# Altium PCB IMX291.PcbDoc
Units mil, origin at the board's own origin, x right, y up, seen from the top; angles counter-clockwise.
Board outline 2450 x 2235 mil, 4 copper layers (Top Layer, Signal Layer 1, Signal Layer 2, Bottom Layer), stack 30.634 mil thick; 97 components, 77 nets, 451 pads, 95 vias.
Unrouted connection lines stored in the file: 1.
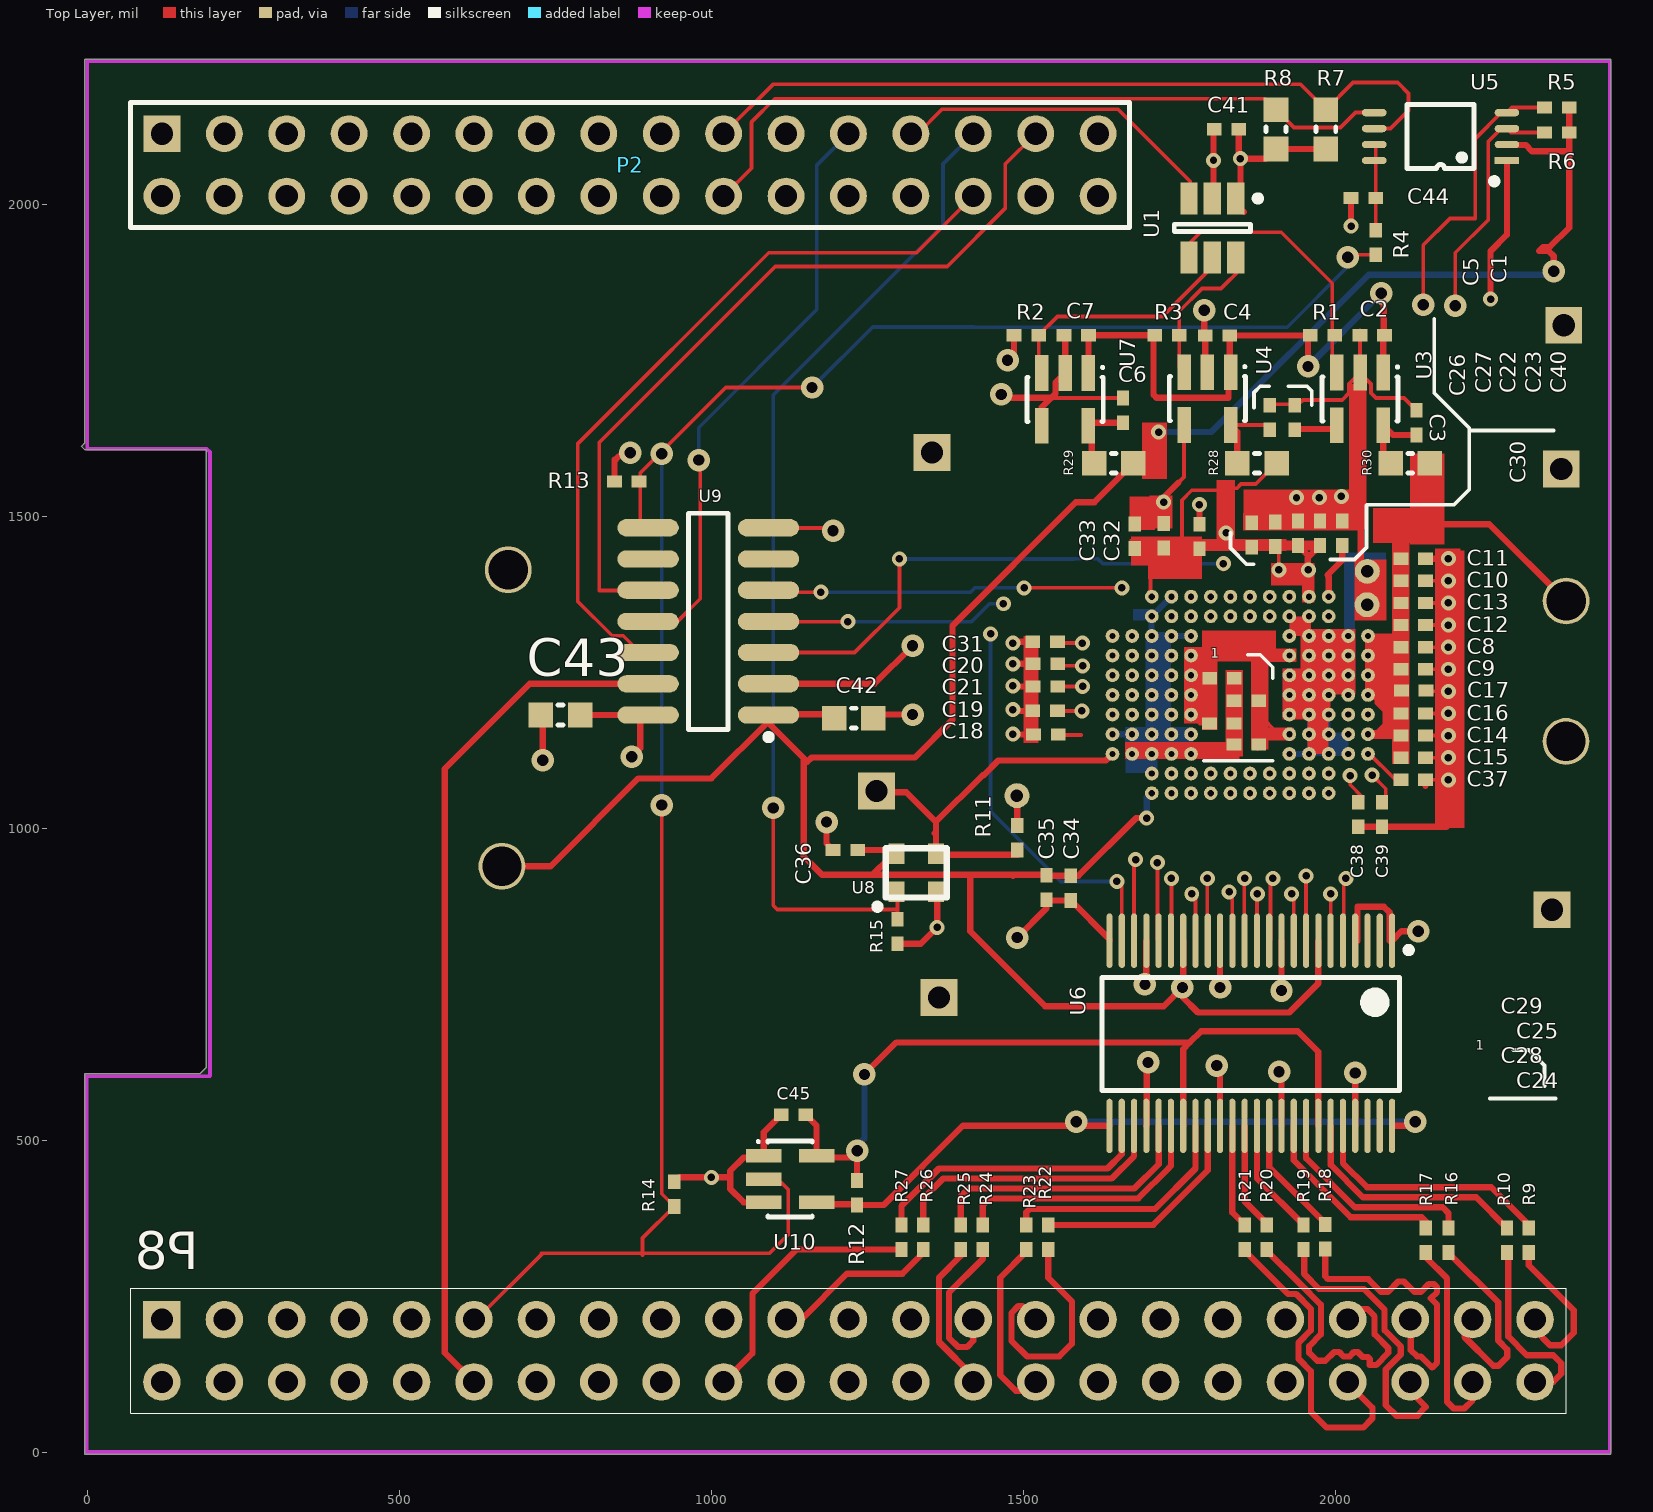
[diagram p0: Top Layer view]
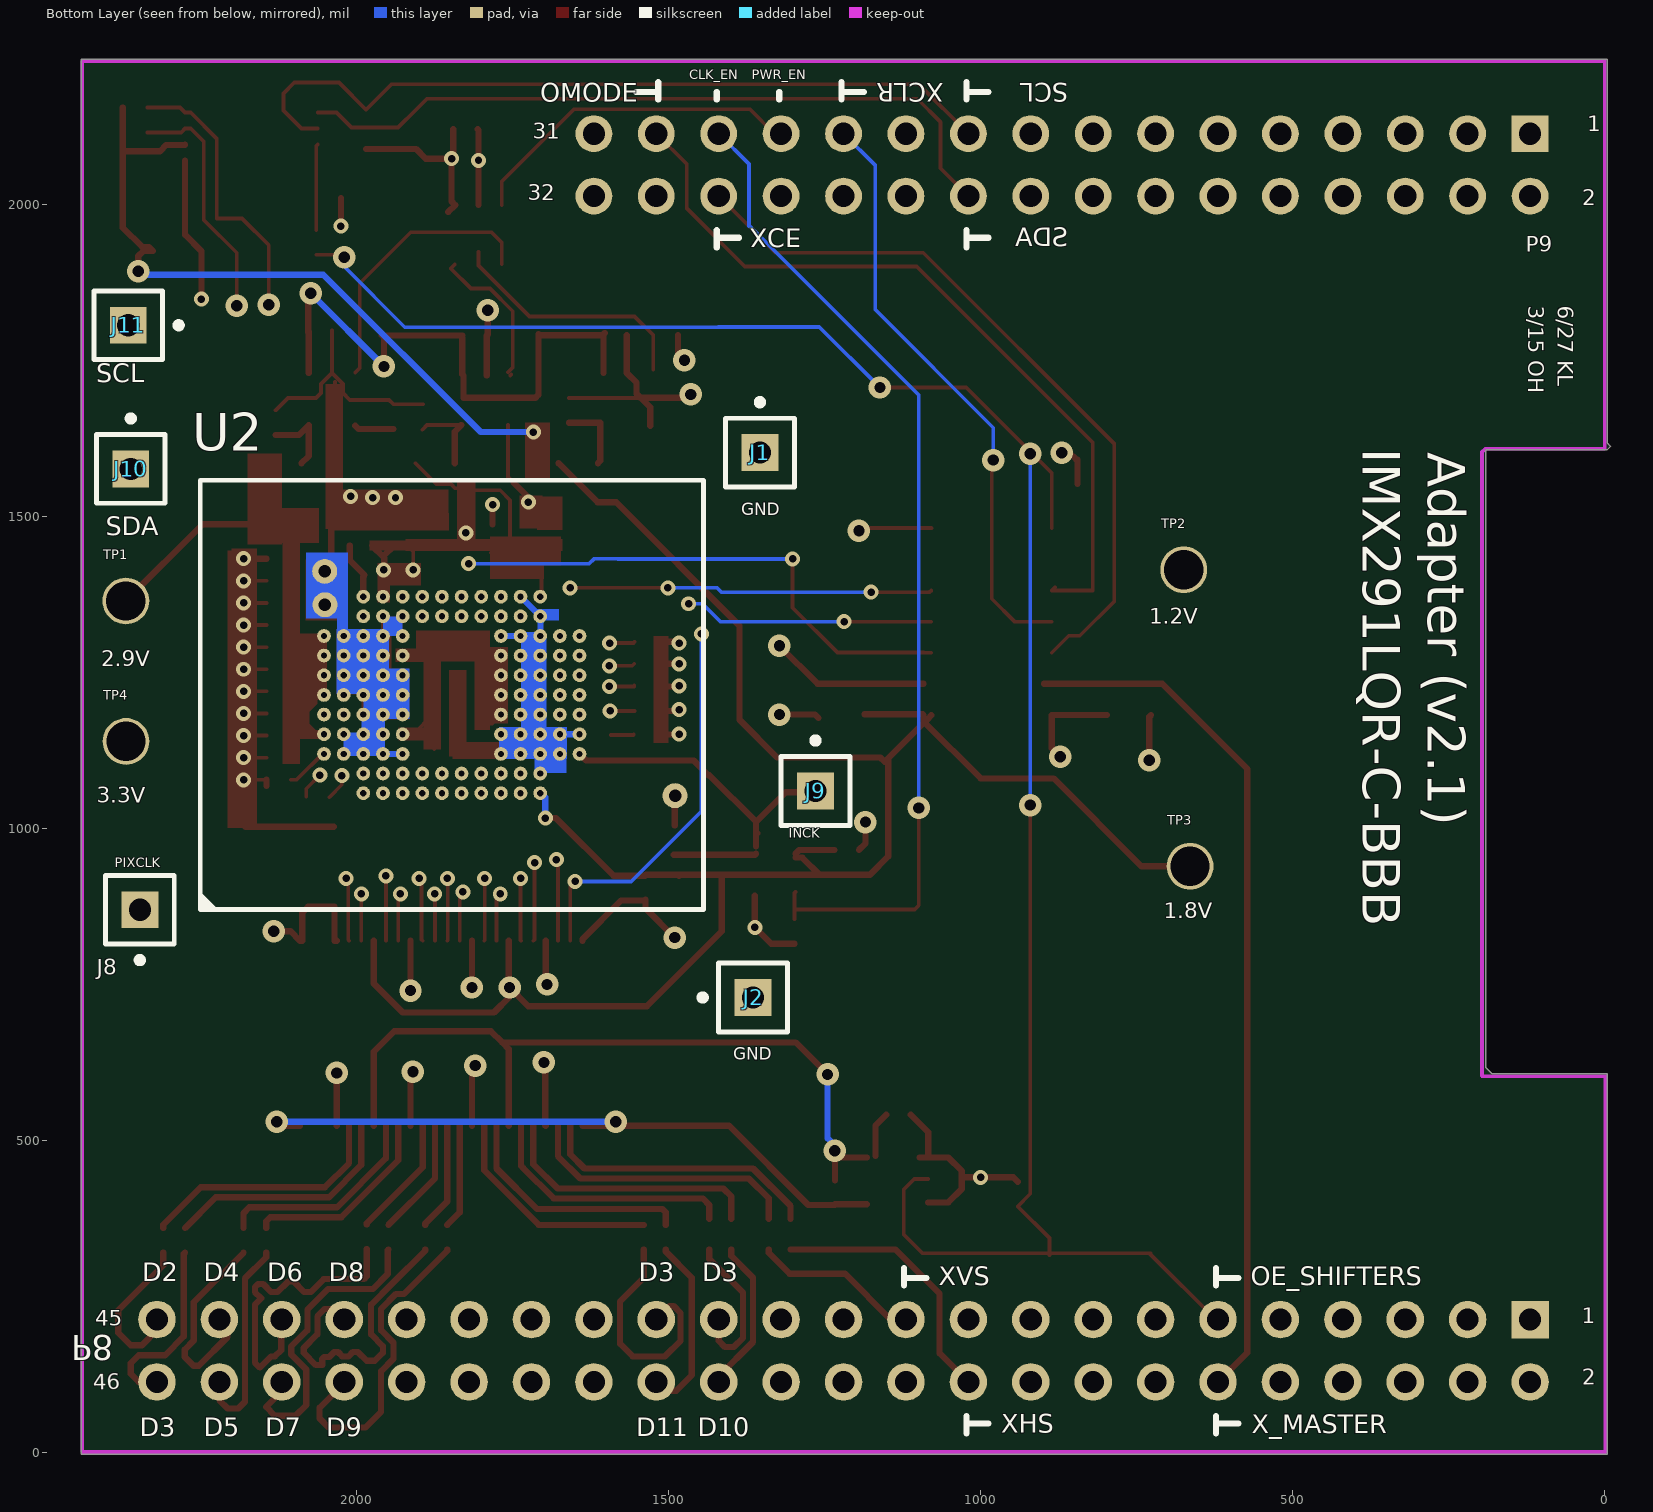
[diagram p1: Bottom Layer view, seen from below]
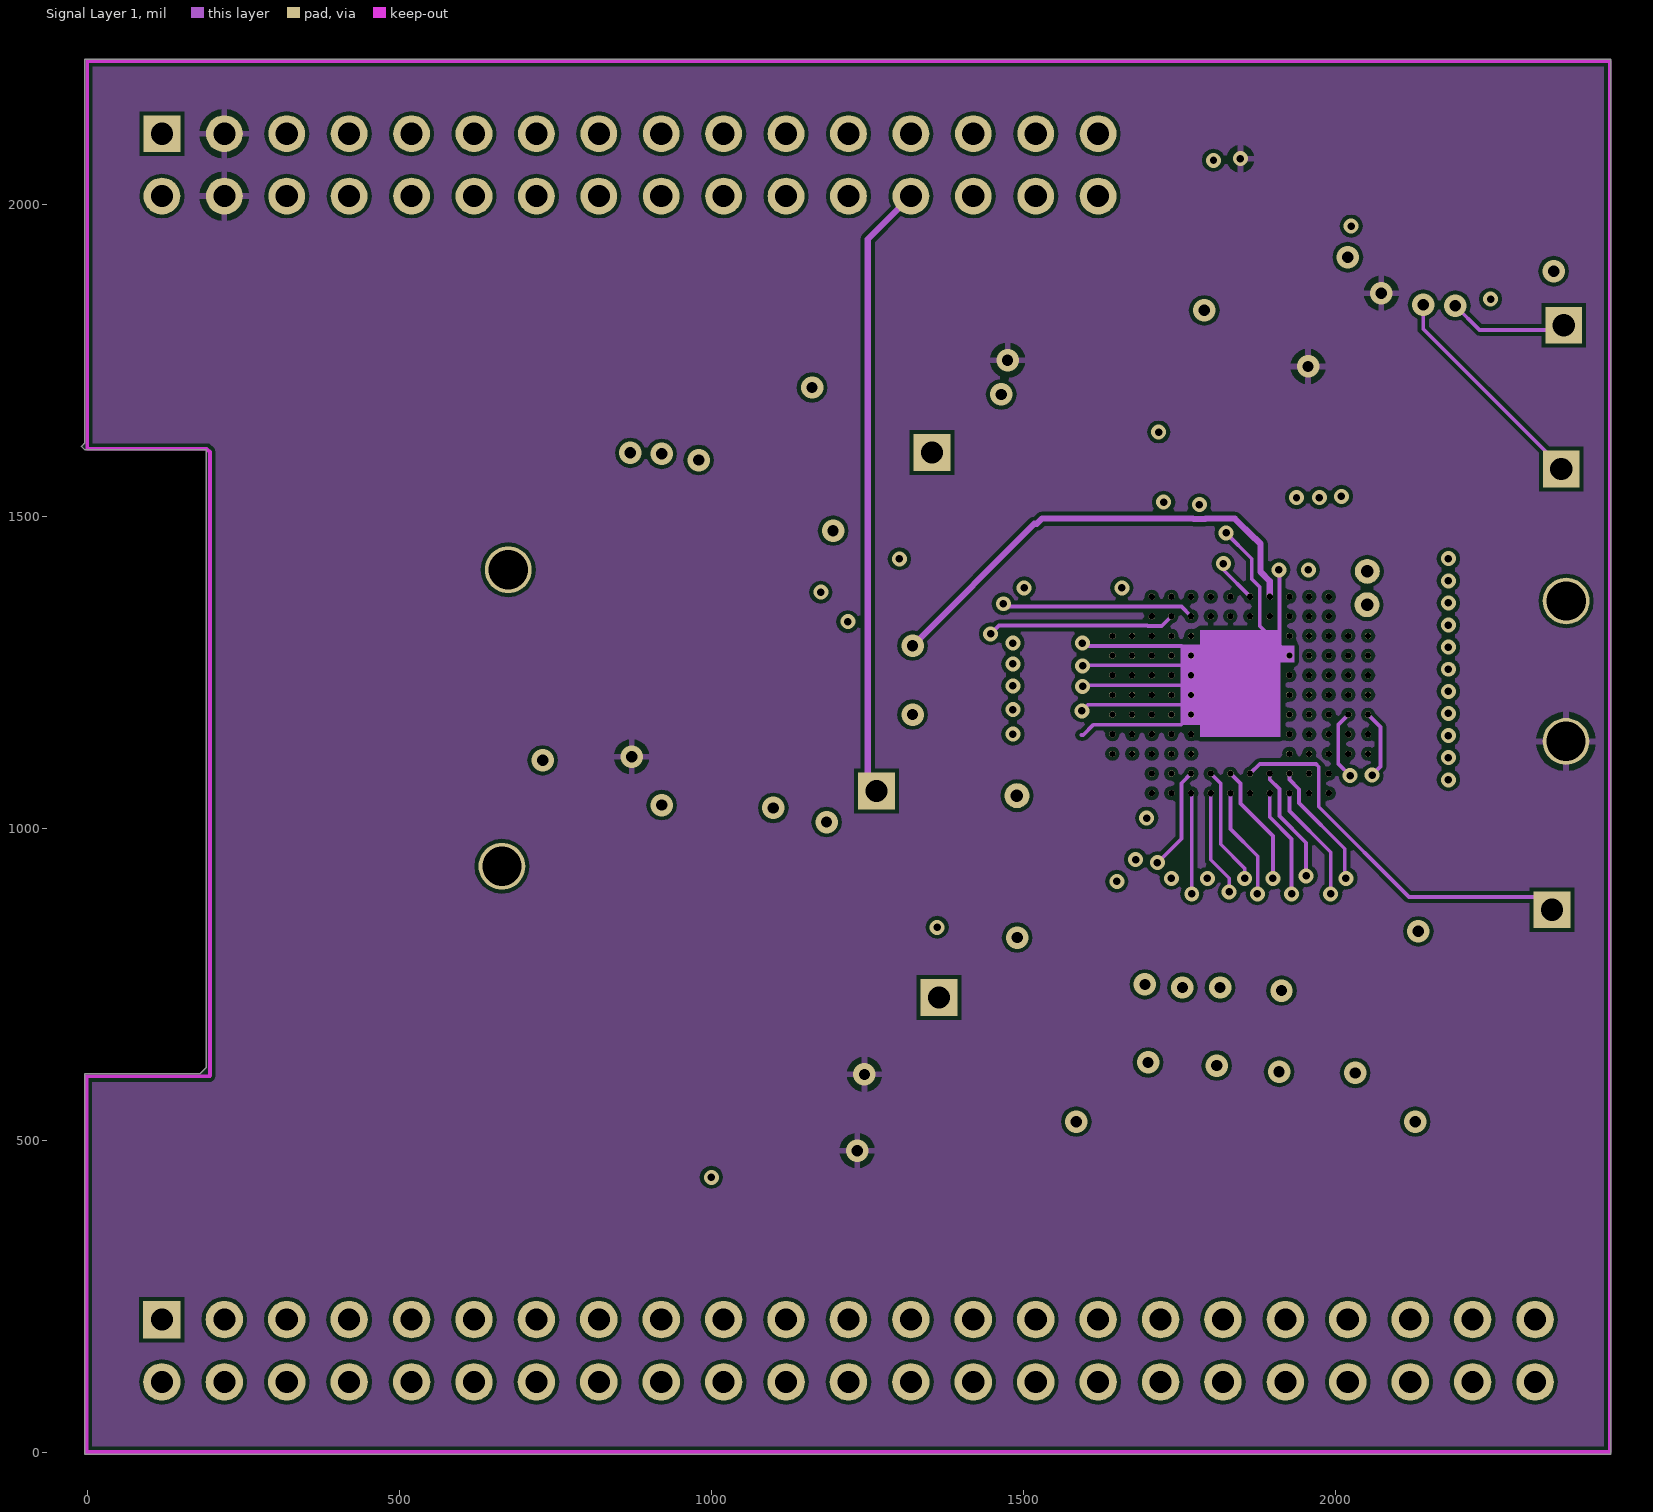
[diagram p2: Signal Layer 1]
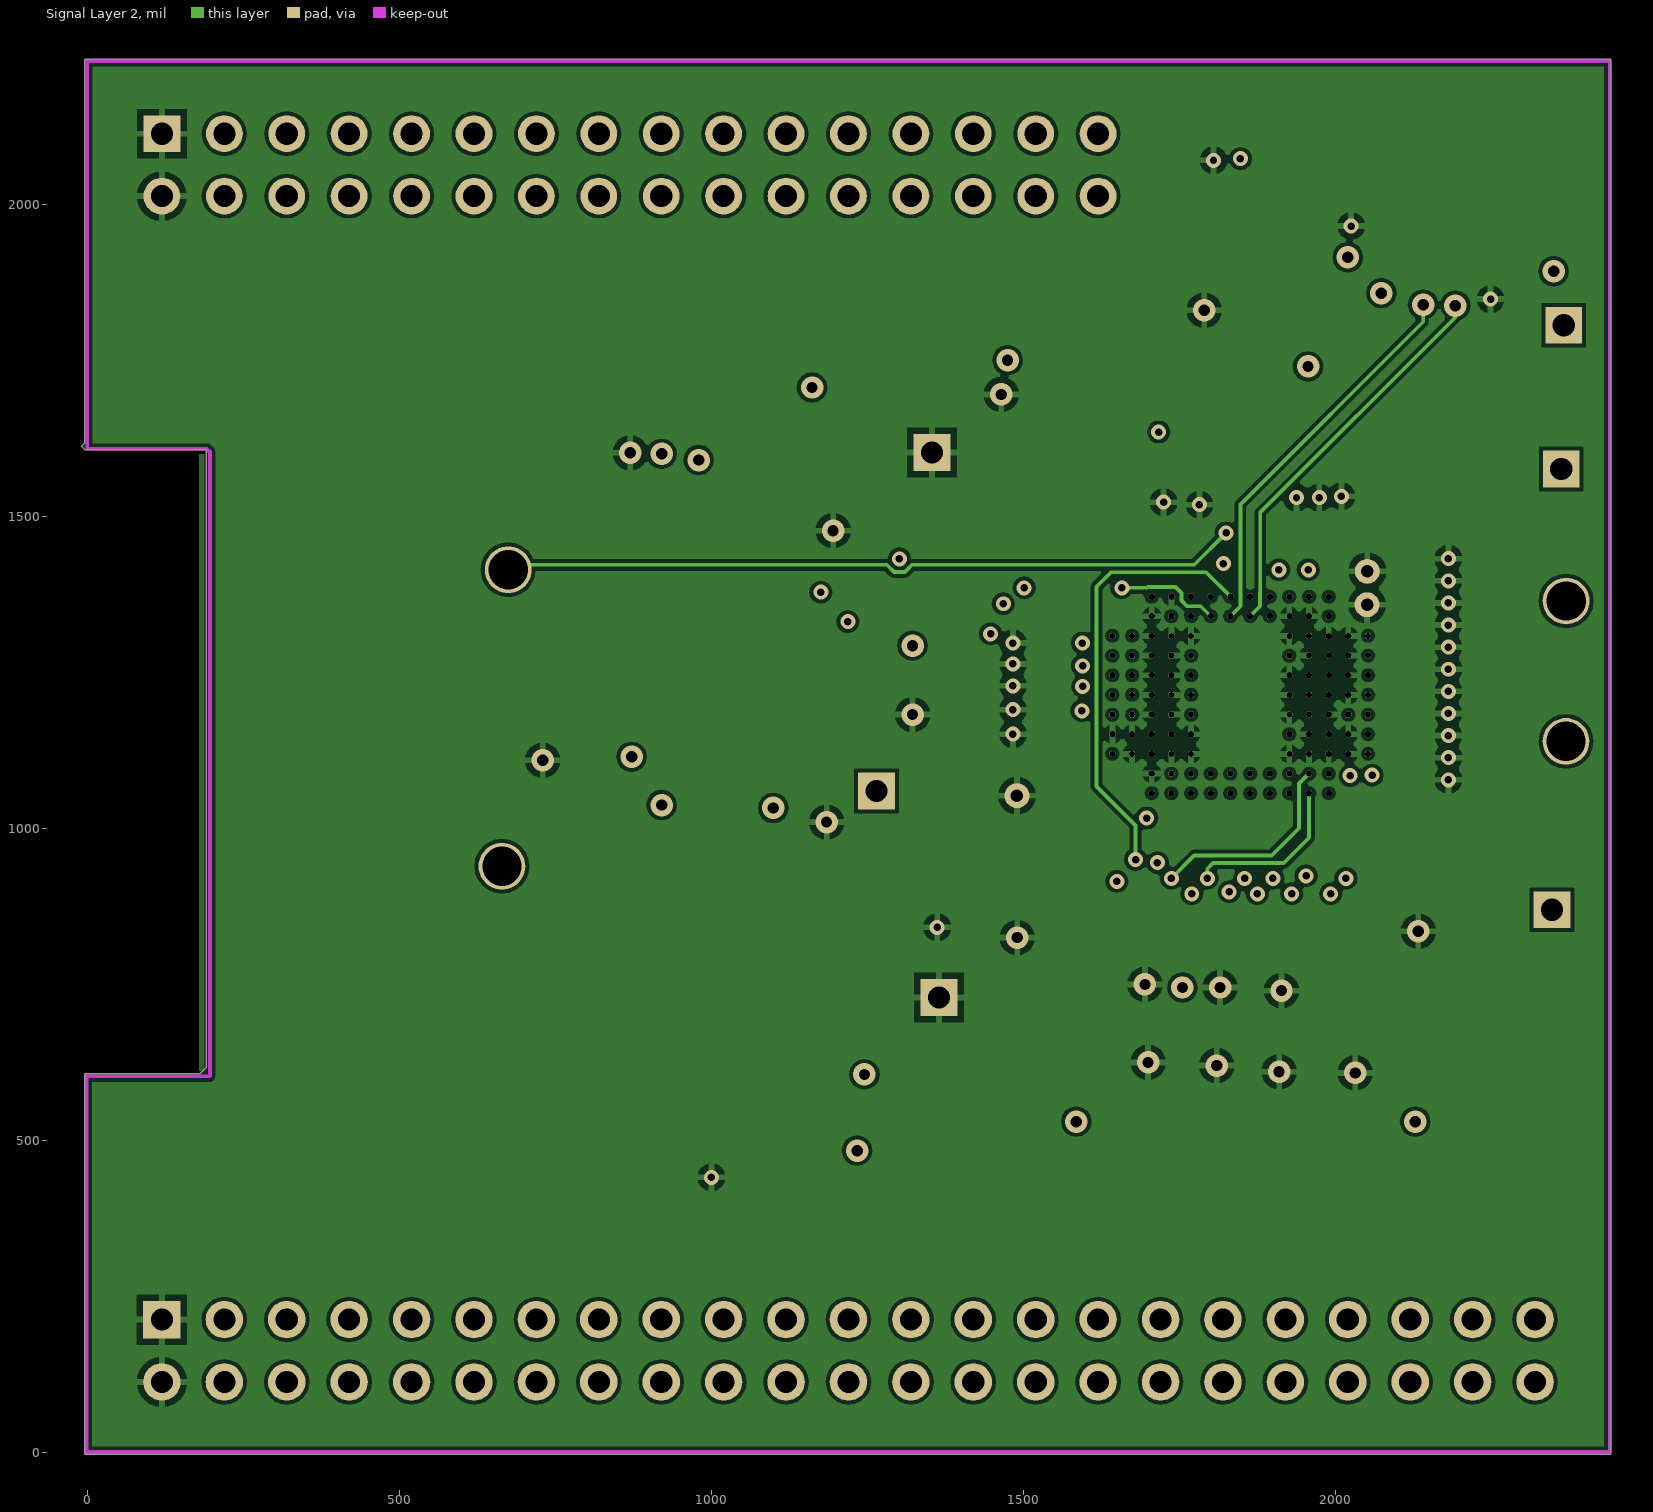
[diagram p3: Signal Layer 2]

## Layer stack, top to bottom
Top Solder: solder mask 0.4, Solder Resist, Dk 3.5
Top Layer: signal copper 1.4
Dielectric 1: core 10, FR-4, Dk 4.2
Signal Layer 1: signal copper 1.417
Dielectric 2: prepreg 5, Dk 4.2
Signal Layer 2: signal copper 1.417
Dielectric 3: core 10, Dk 4.2
Bottom Layer: signal copper 1.4
Bottom Solder: solder mask 0.4, Solder Resist, Dk 3.5

## Board outline
2441.04,2231.97 2441.04,-3.03 -3.96,-3.03 -3.96,606.97 181.04,606.97 191.04,616.97 191.04,1606.97 -3.96,1606.97 -8.96,1611.97 -3.96,1616.97 -3.96,2231.97

## Design rules (kind name [scope] priority, off if disabled: settings)
Clearance [All] p1: gap=6
ComponentClearance [All] p1: gap=2 collisioncheckmode=3 verticalgap=10 showdistances=TRUE
HoleSize [All] p1: absolutevalues=TRUE maxlimit=100 minlimit=12 maxpercent=80.000 minpercent=20.000
MatchedLengths cmosOut [InNetClass('cmosOut')] p1: tolerance=10 checknetsindiffpair=FALSE checkdiffpairvsdiffpair=FALSE checkothers=TRUE
MinimumAnnularRing [All] p1: minimumring=6
MinimumSolderMaskSliver [All] p1: minsoldermaskwidth=5
PolygonConnect [All] p1: connectstyle=Relief reliefconductorwidth=10 reliefentries=4 polygonreliefangle="90 Angle" airgapwidth=10
RoutingVias [All] p1: holewidth=28 width=50 viastyle="Through Hole" minholewidth=28 minwidth=50 maxholewidth=28 maxwidth=50
SolderMaskExpansion [All] p1: expansion=4
Width [All] p1: maxlimit=10 minlimit=6 preferedwidth=10
27 further rules are at their usual default settings.

## Classes and differential pairs
net class cmosOut: D0 D1 D2 D3 D4 D5 D6 D7 D8 D9 D10 D11 FRAME_VALID3.3 LINE_VALID3.3

## Components (designator, comment, footprint, x,y, rotation, side; value= is the part's Value field where it differs from the comment)
C1 "10nF" 0402#1 1934.8,1658.27 r90 top
C2 "1uF" 0402#1 2059.17,1790 r180 top
C3 "1uF" 0402#1 2130,1650 r270 top
C4 "1uF" 0402#1 1811.25,1789.64 r180 top
C5 "1uF" 0402#1 1894.8,1658.27 r270 top
C6 "1uF" 0402#1 1660,1669.68 r270 top
C7 "1uF" 0402#1 1585,1790 r180 top
C8 "0.1uF" 0402#1 2124.99,1290.34 r0 top
C9 "1.0uF" 0402#1 2124.99,1254.91 r0 top
C10 "0.1uF" 0402#1 2124.99,1396.64 r180 top
C11 "4.7uF" 0402#1 2124.99,1432.07 r180 top
C12 "0.1uF" 0402#1 2124.99,1325.77 r180 top
C13 "4.7uF" 0402#1 2124.99,1361.2 r180 top
C14 "4.7uF" 0402#1 2124.99,1148.61 r180 top
C15 "0.1uF" 0402#1 2124.99,1113.17 r180 top
C16 "4.7uF" 0402#1 2124.99,1184.04 r180 top
C17 "0.1uF" 0402#1 2125.81,1220.7 r180 top
C18 "0.01uF" 0402#1 1536.26,1150.39 r0 top
C19 "1.0uF" 0402#1 1535.08,1188.19 r0 top
C20 "0.01uF" 0402#1 1535.47,1263.78 r0 top
C21 "1.0uF" 0402#1 1535.47,1227.17 r0 top
C22 "0.1uF" 0402#1 1940.11,1472.68 r270 top
C23 "4.7uF" 0402#1 1975.54,1472.68 r270 top
C24 "0.1uF" 0402#1 1857.52,1134.25 r0 top
C25 "4.7uF" 0402#1 1857.52,1204.33 r0 top
C26 "0.1uF" 0402#1 1866.18,1470.08 r270 top
C27 "4.7uF" 0402#1 1903.98,1471.26 r270 top
C28 "0.1uF" 0402#1 1818.15,1168.11 r180 top
C29 "4.7uF" 0402#1 1818.54,1240.55 r180 top
C30 "0.1uF" 0402#1 1782.32,1467.72 r270 top
C31 "4.7uF" 0402#1 1535.08,1298.82 r0 top
C32 "0.1uF" 0402#1 1725.24,1468.9 r270 top
C33 "4.7uF" 0402#1 1678.78,1468.11 r270 top
C34 ".01uF" 0402#1 1576.28,904.22 r270 top
C35 "4.7uF" 0402#1 1537.28,905.22 r270 top
C36 "18pF" 0402#1 1215,965.31 r0 top
C37 "1uF" 0402#1 2124.99,1077.74 r0 top
C38 "1uF" 0402#1 2036.8,1022.27 r270 top
C39 "1uF" 0402#1 2074.8,1022.27 r270 top
C40 "0.22uF" 0402#1 2010.97,1472.68 r90 top
C41 "1uF" 0402#2 1825.71,2120 r180 top
C42 "0.1uF" 0603 1228.46,1176.62 r180 top
C43 "0.1uF" 0603 758.78,1181.62 r180 top
C44 "0.1uF" 0402#1 2045,2010 r180 top
C45 "0.1uF" 0402#1 1132,541 r180 top
J1 "GND" PIN1 1354,1602 r180 bottom
J2 "GND" PIN1 1365,729 r90 bottom
J8 "PIXCLK" PIN1 2347.46,869.62 r0 bottom
J9 "INCK" PIN1 1265,1060 r180 bottom
J10 "SDA" PIN1 2362,1576 r180 bottom
J11 "SCL" PIN1 2366,1806 r270 bottom
P2 "P9" HDR2X16 120,2112.97 r0 top
P8 "P8" HEADER23X2 1220,163 r0 top
R1 "100k" 0402#1 1979.45,1790 r180 top
R2 "100k" 0402#2 1505,1790 r0 top
R3 "100k" 0402#1 1730.24,1790 r180 top
R4 "200k" 0402#1 2065,1938.58 r90 top
R5 "1k" 0402#1 2355,2155 r0 top
R6 "1k" 0402#1 2355,2115 r0 top
R7 "10k" 0603 1985,2120 r90 top
R8 "10k" 0603 1905,2120 r90 top
R9 "50" 0402#1 2310,340 r270 top
R10 "50" 0402#1 2275,340 r270 top
R11 "1K" 0402#1 1490.24,985 r270 top
R12 "1K" 0402#1 1233.67,416.22 r90 top
R13 "1K" 0402#1 864.71,1555.61 r0 top
R14 "10K" 0402#1 941,414 r270 top
R15 "10K" 0402#1 1298.65,834.69 r90 top
R16 "50" 0402#1 2181.24,340 r270 top
R17 "50" 0402#1 2145,340 r270 top
R18 "50" 0402#1 1983.78,345.64 r270 top
R19 "50" 0402#1 1949.09,345 r270 top
R20 "50" 0402#1 1890,345 r270 top
R21 "50" 0402#1 1855,345 r270 top
R22 "50" 0402#1 1540,345 r270 top
R23 "50" 0402#1 1505,345 r270 top
R24 "50" 0402#1 1435,345 r270 top
R25 "50" 0402#1 1400,345 r270 top
R26 "50" 0402#1 1340,345 r270 top
R27 "50" 0402#1 1305,345 r270 top
R28 "0" 0603 1874.43,1585 r0 top
R29 "0" 0603 1645,1585 r0 top
R30 "0" 0603 2120,1585 r0 top
TP1 "36-5005-ND" testPoint 2370,1365 r90 bottom
TP2 "36-5005-ND" testPoint 675,1415 r90 bottom
TP3 "36-5005-ND" testPoint 665,940 r90 bottom
TP4 "36-5005-ND" testPoint 2369.8,1140 r90 bottom
U1 "LM3880MFX-1AB/NOPB" SOT23-6_M 1803,1962 r270 top
U2 "IMX291" SOCKET 1847.68,1213.78 r0 bottom
U3 "LP3985IM5-2.9/NOPB" DBV005 2039.59,1688 r180 top
U4 "LP3990MF-1.2/NOPB" DBV005 1795,1688.47 r180 top
U5 "PCA9306DTR2G" TSOPP8 2275,2070 r180 top
U6 "SN74AVCH16T245GR" TSSOP48 2090.97,805 r270 top
U7 "LP3990MF-1.8/NOPB" DBV005 1567.15,1687.28 r180 top
U8 "DSC1001" "DSC1001 2.5x.2.0mm" 1328.65,928.69 r0 top
U9 "TXB0104D" SOIC_14 995.46,1331.62 r180 top
U10 "SN74LVC1G04QDBVRQ1" DBV005 1126.58,438.04 r270 top

## Footprints (in the part's own frame and the unit in brackets; to place one, negate y for a bottom-side part, rotate by r counter-clockwise, add the part's x,y. Pads: shape width x height; smd on the part's side, far side on the other; paste and mask are expansions set on the pad)
0402#1 [mm] "Chip Capacitor, Body 1.0x0.5mm, IPC High Density"
  rect 0.6x0.5 smd: 1(-0.5,0) 2(0.5,0)
  body extent -0.55,-0.3 0.55,0.3, height 1.3
0402#2 [mm] "Chip Capacitor, Body 1.0x0.5mm, IPC High Density"
  rect 0.6x0.5 smd: 1(0.5,0) 2(-0.5,0)
  body extent -0.55,-0.3 0.55,0.3, height 1.3
0603 [mm] "Chip Capacitor, 2-Leads, Body 1.6x0.8mm, IPC Medium Density"
  rect 1x1 smd: 1(-0.8,0) 2(0.8,0)
  silkscreen extent -0.1,-0.4 0.1,0.4, body extent -0.9,-0.5 0.9,0.5, height 0.87
DBV005 [mm] "SOT-23/SC-74A; 5 Leads; Body 3 x 3 mm, inc. leads (LxW max)"
  rect 0.55x1.45 smd: 1(-0.95,-1.075) 2(0,-1.075) 3(0.95,-1.075) 4(0.95,1.075) 5(-0.95,1.075)
  silkscreen extent -1.58,-1.35 1.55,0.9
"DSC1001 2.5x.2.0mm" [mil]
  rect 26x33 smd paste+0 mask+0: 1(-31.5,-30.5) 2(31.5,-30.5) 3(31.5,30.5) 4(-31.5,30.5)
  Top Overlay keep-out lines w10: -49,-39.5 49,-39.5 49,39.5 -49,39.5 -49,-39.5
  silkscreen extent -67,-59 49,40
HDR2X16 [mm] "Connector; Header; 16x2 Position"
  rect 1.5x1.5 hole 0.9: 1(0,0)
  round 1.5 hole 0.9: 2(0,-2.54) 3(2.54,0) 4(2.54,-2.54) 5(5.08,0) 6(5.08,-2.54) 7(7.62,0) 8(7.62,-2.54) 9(10.16,0) 10(10.16,-2.54) 11(12.7,0) 12(12.7,-2.54) 13(15.24,0) 14(15.24,-2.54) 15(17.78,0) 16(17.78,-2.54) 17(20.32,0) 18(20.32,-2.54) 19(22.86,0) 20(22.86,-2.54) 21(25.4,0) 22(25.4,-2.54) 23(27.94,0) 24(27.94,-2.54) 25(30.48,0) 26(30.48,-2.54) 27(33.02,0) 28(33.02,-2.54) 29(35.56,0) 30(35.56,-2.54) 31(38.1,0) 32(38.1,-2.54)
  silkscreen extent -1.27,-3.81 39.37,1.27
HEADER23X2 [mil] "HEADER23X2"
  rect 60x60 hole 35.43 mask+2: 1(-1100,50)
  round 60 hole 35.43 mask+2: 2(-1100,-50) 3(-1000,50) 4(-1000,-50) 5(-900,50) 6(-900,-50) 7(-800,50) 8(-800,-50) 9(-700,50) 10(-700,-50) 11(-600,50) 12(-600,-50) 13(-500,50) 14(-500,-50) 15(-400,50) 16(-400,-50) 17(-300,50) 18(-300,-50) 19(-200,50) 20(-200,-50) 21(-100,50) 22(-100,-50) 23(0,50) 24(0,-50) 25(100,50) 26(100,-50) 27(200,50) 28(200,-50) 29(300,50) 30(300,-50) 31(400,50) 32(400,-50) 33(500,50) 34(500,-50) 35(600,50) 36(600,-50) 37(700,50) 38(700,-50) 39(800,50) 40(800,-50) 41(900,50) 42(900,-50) 43(1000,50) 44(1000,-50) 45(1100,50) 46(1100,-50)
  silkscreen extent -1150,-100 1150,100
PIN1 [mm] "Generic Antenna; 1 Lead"
  rect 1.5x1.5 hole 0.9: 1(0,0)
  silkscreen extent -1.4,-1.4 1.4,2.17
SOCKET [mil]
  round 22 / inner round 10 / far side round 22 hole 10 mask+0: 2(204.72,94.49) 3(204.72,62.99) 4(204.72,31.5) 5(204.72,0) 6(204.72,-31.5) 7(204.72,-62.99) 8(204.72,-94.49) 10(173.23,94.49) 11(173.23,62.99) 12(173.23,31.5) 13(173.23,0) 14(173.23,-31.5) 15(173.23,-62.99) 16(173.23,-94.49) 17(141.73,157.48) 18(141.73,125.98) 19(141.73,94.49) 20(141.73,62.99) 21(141.73,31.5) 22(141.73,0) 23(141.73,-31.5) 24(141.73,-62.99) 25(141.73,-94.49) 26(141.73,-125.98) 27(141.73,-157.48) 28(110.24,157.48) 29(110.24,125.98) 30(110.24,94.49) 31(110.24,62.99) 32(110.24,31.5) 33(110.24,0) 34(110.24,-31.5) 35(110.24,-62.99) 36(110.24,-94.49) 37(110.24,-125.98) 38(110.24,-157.48) 39(78.74,157.48) 40(78.74,125.98) 41(78.74,94.49) 42(78.74,62.99) 43(78.74,31.5) 44(78.74,0) 45(78.74,-31.5) 46(78.74,-62.99) 47(78.74,-94.49) 48(78.74,-125.98) 49(78.74,-157.48) 50(47.24,157.48) 51(47.24,125.98) 52(47.24,-125.98) 53(47.24,-157.48) 54(15.75,157.48) 55(15.75,125.98) 56(15.75,-125.98) 57(15.75,-157.48) 58(-15.75,157.48) 59(-15.75,125.98) 60(-15.75,-125.98) 61(-15.75,-157.48) 62(-47.24,157.48) 63(-47.24,125.98) 64(-47.24,-125.98) 65(-47.24,-157.48) 66(-78.74,157.48) 67(-78.74,125.98) 68(-78.74,94.49) 69(-78.74,62.99) 70(-78.74,31.5) 71(-78.74,0) 72(-78.74,-31.5) 73(-78.74,-62.99) 74(-78.74,-94.49) 75(-78.74,-125.98) 76(-78.74,-157.48) 77(-110.24,157.48) 78(-110.24,125.98) 79(-110.24,94.49) 80(-110.24,62.99) 81(-110.24,31.5) 82(-110.24,0) 83(-110.24,-31.5) 84(-110.24,-62.99) 85(-110.24,-94.49) 86(-110.24,-125.98) 87(-110.24,-157.48) 88(-141.73,157.48) 89(-141.73,125.98) 90(-141.73,94.49) 91(-141.73,62.99) 92(-141.73,31.5) 93(-141.73,0) 94(-141.73,-31.5) 95(-141.73,-62.99) 96(-141.73,-94.49) 97(-141.73,-125.98) 98(-141.73,-157.48) 99(-173.23,94.49) 100(-173.23,62.99) 101(-173.23,31.5) 102(-173.23,0) 103(-173.23,-31.5) 104(-173.23,-62.99) 105(-173.23,-94.49) 107(-204.72,94.49) 108(-204.72,62.99) 109(-204.72,31.5) 110(-204.72,0) 111(-204.72,-31.5) 112(-204.72,-62.99) 113(-204.72,-94.49)
  silkscreen extent -403,-344 405,344, body extent -405,-345 405,345, height 138
SOIC_14 [mm] "14-Pin Small Outline Integrated Circuit 1.27 mm Pitch, IPC Low Density"
  oval 2.5x0.7 smd: 1(-2.45,3.81) 2(-2.45,2.54) 3(-2.45,1.27) 4(-2.45,0) 5(-2.45,-1.27) 6(-2.45,-2.54) 7(-2.45,-3.81) 8(2.45,-3.81) 9(2.45,-2.54) 10(2.45,-1.27) 11(2.45,0) 12(2.45,1.27) 13(2.45,2.54) 14(2.45,3.81)
  silkscreen extent -2.58,-4.4 0.8,4.83, body extent -2,-4.38 2,4.38, height 1.75
SOT23-6_M [mm] "SOT23, 6-Leads, Body 2.9x1.6mm, Pitch 0.95mm, Lead Span 2.7mm, IPC Low Density"
  rect 1.3x0.7 smd: 1(-1.2,0.95) 2(-1.2,0) 3(-1.2,-0.95) 4(1.2,-0.95) 5(1.2,0) 6(1.2,0.95)
  silkscreen extent -1.32,-1.55 0.15,1.98, body extent -0.9,-1.55 0.9,1.55, height 1.45
testPoint [mil]
  round 75 hole 63: 1(-0.7,-0.2)
TSOPP8 [mm]
  rect 1x0.3 smd: 1(0,0)
  oval 1x0.3 smd: 2(0,-0.65) 3(0,-1.3) 4(0,-1.95) 5(5.4,-1.95) 6(5.4,-1.3) 7(5.4,-0.65) 8(5.4,0)
  silkscreen extent 0.39,-2.28 4.07,0.97
TSSOP48 [mm]
  oval 2.212x0.25 smd: 1(-0.381,0) 2(-0.381,-0.5) 3(-0.381,-1) 4(-0.381,-1.5) 5(-0.381,-2) 6(-0.381,-2.5) 7(-0.381,-3) 8(-0.381,-3.5) 9(-0.381,-4) 10(-0.381,-4.5) 11(-0.381,-5) 12(-0.381,-5.5) 13(-0.381,-6) 14(-0.381,-6.5) 15(-0.381,-7) 16(-0.381,-7.5) 17(-0.381,-8) 18(-0.381,-8.5) 19(-0.381,-9) 20(-0.381,-9.5) 21(-0.381,-10) 22(-0.381,-10.5) 23(-0.381,-11) 24(-0.381,-11.5) 25(7.154,-11.5) 26(7.154,-11) 27(7.154,-10.5) 28(7.154,-10) 29(7.154,-9.5) 30(7.154,-9) 31(7.154,-8.5) 32(7.154,-8) 33(7.154,-7.5) 34(7.154,-7) 35(7.154,-6.5) 36(7.154,-6) 37(7.154,-5.5) 38(7.154,-5) 39(7.154,-4.5) 40(7.154,-4) 41(7.154,-3.5) 42(7.154,-3) 43(7.154,-2.5) 44(7.154,-2) 45(7.154,-1.5) 46(7.154,-1) 47(7.154,-0.5) 48(7.154,0)
  silkscreen extent -0.12,-11.8 5.72,0.8, body extent 0.33,-11.8 6.48,0.3, height 1.2

## Part data
C1 C2 C3 C4 C5 C6 C7 C8 C9 C10 C11 C12 C13 C14 C15 C16 C17 C18 C19 C20 C21 C22 C23 C24 C25 C26 C27 C28 C29 C30 C31 C32 C33 C34 C35 C36 C37 C38 C39 C40 C41 C42 C43 C44 C45: library part cap
J1 J2 J8 J9 J10 J11: library part Socket, "Socket"
P2: library part "Header 16X2"
P8: library part HDR_46_F_2_0.1_0.1, "CONN HEADER FMAL 46PS.1\" DL GOLD"
R1 R2 R3 R4 R5 R6 R7 R8: library part Res, "resistor"
R9 R10 R11 R12 R13 R14 R15 R16 R17 R18 R19 R20 R21 R22 R23 R24 R25 R26 R27 R28 R29 R30: library part res
TP1 TP2 TP3 TP4: library part testPoint, "testPoint"
U1: library part LM3880
U3: library part LP3985
U4 U7: library part LP3990
U5: library part PCA9306
U6: library part SN74AVCH16T245
U9: library part TXB0104
U10: library part SN74LVC1G04

## Free pads (board coordinates)
  round 40 hole 20: 1(2050.83,1358.27) 1(2051.22,1411.81) 2(1490,1052.33)

## Via types
v1: diameter 24, hole 12, Top Layer to Bottom Layer, 60 vias
v2: diameter 36, hole 18, Top Layer to Bottom Layer, 35 vias

## Nets (pads, with @x,y where several pads share a name; then routed paths per layer and width w, separated by ;. In a path a pad name is that pad's centre, name@x,y a point inside that pad or via, vN(x,y) a via of type N, cw(c..) or ccw(c..) an arc to the next point about the centre after c; other vN are vias at no path point)
1.2V: C18.2 C19.2 C20.2 C21.2 C22.2 C23.2 C24.2 C25.2 C26.2 C27.2 C28.2 C29.2 C30.2 C31.2 C32.2 C33.2 R28.2 TP2.1 U2.38 U2.42 U2.46 U2.70 U2.71 U2.72 U2.73 U2.98 | length 3295.1
  Top Layer w6: C19.2 1593.91,1188.19 v1(1594.02,1188.3) ; C31.2 1556.62,1296.96 v1(1594.91,1296.96) ; C21.2@1555.16,1229.28 C21.2 1594.91,1227.17 v1(1595.12,1227.37) ; C20.2 1558.56,1260.37 v1(1595.02,1260.37) ; C18.2 1556.73,1149.61 1592.8,1149.61 ; C33.2@1678.78,1451.57 1696.01,1434.34 1696.01,1429.37 1703.89,1421.49 C32.2@1724.76,1442.37 ; 1703.89,1409.68 1703.89,1373.32 U2.98 ; C32.2 1736.65,1449.21 1754.22,1466.78 1754.22,1525.84 1769.96,1541.57 1829.87,1541.57 ; U2.73 U2.73@1768.94,1280.3 ; C30.2@1778.39,1448.03 C30.2@1784.8,1441.61 ; 1798.07,1211.02 1769.33,1182.28 U2.70 1783.11,1168.11 C28.2 ; 1838.23,1545 1842.55,1545 1849.07,1551.52 1872.45,1551.52 R28.2 ; C24.2@1875.63,1127.17 1899.25,1150.79 1909.49,1150.79 ; C25.2 1877.2,1183.07 1909.49,1150.79 ; C27.2 1910.42,1445.13 1909.49,1444.2 v1(1909.49,1414.17) ; U2.42 1909.49,1150.79
  Top Layer w10: C22.2 1955.85,1437.24 ; U2.38 1955.85,1373.32 1955.85,1433.3 C23.2
  Signal Layer 1 w6: 1592.8,1149.61 1596.23,1149.61 1612.8,1166.18 1649.33,1166.18 1649.47,1166.04 1667.93,1166.04 1668.07,1166.18 1680.82,1166.18 1680.96,1166.04 1699.43,1166.04 ; v1(1594.02,1188.3) 1603.62,1197.9 1752.94,1197.9 ; v1(1594.91,1296.96) 1599.6,1292.27 1753.44,1292.27 ; v1(1595.02,1260.37) 1596.02,1261.38 1752.83,1261.38 ; v1(1595.12,1227.37) 1597.03,1229.28 1752.94,1229.28 ; 1699.57,1166.18 1712.32,1166.18 ; 1712.46,1166.04 1730.93,1166.04 ; 1731.07,1166.18 1743.82,1166.18 ; 1743.95,1166.04 1752.94,1166.04 ; v1(1825,1473.27) 1866.18,1432.09 1866.18,1399.5 1878.92,1386.76 1878.92,1324.26 1910.42,1292.77 ; v1@1910.42,1414.17 1910.42,1292.77 ; U2.46 1910.42,1292.77
  Signal Layer 2 w6: TP2.1 682.74,1422.24 1281.4,1422.24 1292.95,1410.69 1310.34,1410.69 1321.9,1422.24 1773.97,1422.24 v1(1825,1473.27)
  Bottom Layer w6: U2.98@1703.89,1374.11 U2.98@1705.55,1372.44
  other v1: 1956.73,1414.17
1.8V: C34.1 C35.1 C36.2 C42.2 R5.2 R6.2 R29.2 TP3.1 U2.88 U5.2 U6.7 U6.18 U8.4 U9.1 | length 4510.7
  Top Layer w10: TP3.1 742.75,939.3 883.45,1080 1000.39,1080 1091.92,1171.53 U9.1 1093.24,1182.94 C42.2@1186.46,1182.94 ; U9.1@1079.28,1181.2 1085.39,1175.09 1090.44,1170.04 1148.3,1112.19 ; C36.2 1291.02,965.32 U8.4 ; U8.4@1297.15,953.19 1285.98,953.19 1258.48,925.69 ; 1483.49,924.18 1485,925.69 ; R29.2 1614.01,1522.52 1584.23,1522.52 1386.65,1324.93 1386.65,1173.8 1326.19,1113.35 1160.8,1113.35 1153.97,1106.51 1148.3,1112.19 ; v1(1697.71,1016.55) 1681.1,1016.55 1588.45,923.9 C34.1 1538.28,923.9 C35.1 1536.5,925.69 1485,925.69 ; U6.18 1756.32,746.32 v2(1755,745) ; U6.7 1972.86,751.44 1926.42,705 1780,705 1755,730 v2(1755,745) ; U5.2 2275.59,2095 2305,2095 2315,2085 2374.69,2085 ; v2(2349.84,1892.54) 2349.84,1917.01 2341.97,1924.88 2326.38,1924.88 2333.07,1931.58 2343.9,1931.58 2374.69,1962.36 2374.69,2085 ; R5.2 R6.2 2374.69,2085 ; 1148.3,1112.19 1148.3,955 1177.61,925.69 1258.48,925.69 ; 1258.48,925.69 1415,925.69 ; 1415,925.69 1415,835 1535,715 1725,715 v2(1755,745) ; 1415,925.69 1485,925.69
  Bottom Layer w10: v1(1697.71,1016.55) 1697.71,1049.64 U2.88@1705.55,1057.48 ; v1(1716.95,1635) 1801.53,1635 2053.57,1887.03 2343.94,1887.03 v2@2347.87,1883.09
2.9V: C8.1 C9.1 C10.2 C11.2 C12.2 C13.2 C14.2 C15.2 C16.2 C17.2 R30.2 TP1.1 U2.3 U2.5 U2.6 U2.7 U2.8 | length 284.9
  Top Layer w10: C9.1@2097.43,1247.03 C9.1 ; C12.2@2101.37,1321.83 C12.2 ; C11.2@2105.31,1430.1 C11.2 ; 2108.8,1469.27 2108.8,1478.27 ; R30.2@2132.04,1579.96 R30.2@2133.02,1578.97 ; 2165,1487.4 2246.7,1487.4 TP1.1
3.3EN: C44.1 R4.2 U5.7 U5.8 | length 138.4
  Top Layer w6: U5.7 2065,2092.99 R4.2
3.3V: C2.1 C4.1 C7.1 C41.2 C43.1 C45.1 P2.3 P2.4 R1.2 R2.2 R3.2 R7.1 R8.1 R12.2 TP4.1 U1.1 U3.1 U4.1 U6.31 U6.42 U7.1 U9.14 U10.5 | length 2787.8
  Top Layer w10: C43.1@798.15,1181.62 U9.14@885.95,1181.62 ; v2(872.59,1114.67) 886.37,1128.45 U9.14@886.37,1181.2 ; C45.1 1168.91,523.78 U10.5 ; U10.5@1182.78,472.68 v2@1233.67,472.68 ; R12.2 v2@1233.67,472.68 ; v2(1233.89,483.64) 1233.67,483.42 v2@1233.67,472.68 ; v2@1233.89,486.45 1241.28,493.85 1242.45,493.85 1234.02,485.43 v2@1234.02,483.64 ; v2(1245.63,605.83) 1296.77,656.97 1766.97,656.97 ; v2(1475,1750) 1485.31,1760.31 R2.2 ; C7.1@1602.59,1793.58 1604.56,1791.61 U7.1 ; C7.1 1707.22,1790 1708.89,1791.66 1708.89,1694.62 1713.5,1690 1828.96,1690 1828.96,1725.67 1830.93,1727.64 C4.1@1830.93,1785.71 ; U6.31 1756.32,646.32 1766.97,656.97 ; C4.1 R1.2@1959.41,1789.64 ; C41.2 1845.39,2075.58 v1(1848,2072.97) ; U1.1@1853.14,1987.69 1842.24,1998.58 1848,2004.34 v1(1848,2072.97) ; v2(1956.29,1740) 1956.29,1786.53 R1.2@1959.41,1789.64 ; R1.2 R1.2@1959.41,1789.64 ; U6.42 1972.86,642.14 1940,675 1785,675 1766.97,656.97 ; R7.1 R8.1 1889.47,2072.97 v1(1848,2072.97) ; U3.1@2077,1729.6 2077,1795.55 2077.78,1794.76 v2@2077.78,1850.26
  Bottom Layer w10: v2@1237.31,493.85 1236.8,494.36 1245.63,503.2 v2(1245.63,605.83) ; v2@1951.29,1735 v2(1956.29,1740) v2(2073.75,1857.46)
CLK_ENABLE: P2.27 R15.2 U8.1 | length 1614.7
  Top Layer w6: v2(1099.55,1032.66) 1099.55,876.62 1106.05,870.12 1297.46,870.12 ; U8.1 1298.65,896.69 1298.65,892.19 R15.2
  Bottom Layer w6: v2(1099.55,1032.66) 1099.55,1694.22 1370.33,1965 1371.26,1965 1371.26,2064.23 P2.27
D0: P8.27 R24.2 | length 248.9
  Top Layer w10: P8.27 P8.27@1421.63,212.97 ; P8.27 1420,179 1410,169 1395.63,169 1381,183.63 1381,256 1435,310 R24.2
D0B: U2.29 U6.19 | length 432.4
  Top Layer w6: U6.19 1737.44,820.8 v1(1737.44,920)
  Signal Layer 2 w6: v1(1737.44,920) 1773.82,956.38 1898.29,956.38 1941.92,1000 1941.92,1071.8 U2.29
D1: P8.29 R22.2 | length 379.7
  Top Layer w10: P8.29 1498.31,234.69 1492.31,234.69 1481,223.37 1481,179 1506,154 1558,154 1578,174 1578,241.98 1540,279.98 R22.2
D1B: U2.28 U6.16 | length 372.5
  Top Layer w6: v1(1795,920) 1795,820.69 U6.16
  Signal Layer 2 w6: v1(1795,920) 1795,935.16 1804.22,944.38 1917.29,944.38 1957.91,985 U2.28 U2.28@1955.67,1056.3
D2: P8.45 R9.2 | length 255.4
  Top Layer w10: R9.2 2310,300 2382,228 2382,192 2362,172 2344,172 2320,196 P8.45
D3: P8.46 R10.2 | length 302.3
  Top Layer w10: R10.2 2277,318.32 2277,186 2307,156 2349,156 2362,143 2362,126 2349,113 P8.46
D4: P8.43 R16.2 | length 333.1
  Top Layer w10: R16.2 2260.97,240.58 2260.97,179.4 2275.49,164.88 2275.49,153 2261.49,139 2253,139 2207,185 2207,200 P8.43
D5: P8.44 R17.2 | length 354.6
  Top Layer w10: R17.2 2145,312.9 2179,278.9 2179,81 2189.5,70.5 2206.5,70.5 2220,84 P8.44 P8.44@2235,98
D6: P8.41 R18.2 | length 490.5
  Top Layer w10: R18.2 1983.78,282.36 1988.33,277.81 2052.71,277.81 2073.52,257 2084,257 2101,274 2110,274 2127,257 2137,257 2150,270 2158,270 2163,265 2163,257 2153,247 2163,237 2163,144 2155,136 2137,154 2131,154 2121,164 2121,212 P8.41
D7: P8.42 R19.2 | length 493.6
  Top Layer w10: R19.2 1950.24,324.16 1950.24,286 1974.43,261.81 2046.08,261.81 2079,228.89 2079,196.02 2105,170.02 2105,157 2081,133 2081,76 2098,59 2132,59 2132,60 2145,73 2120,98 P8.42
D8: P8.39 R20.2 | length 514.6
  Top Layer w10: R20.2 1890,323.58 1943.58,270 1977,236.61 1977,189.37 1958,170.37 1958,160 1971,147 1984,147 1998,161 2006,161 2013,154 2023,154 2030,161 2036,161 2044,153 2052,153 2055,150 2055,140 2065.37,140 2085,159.63 2085,167.39 2063,189.39 2063,218 2051.02,229.98 2028.02,229.98 2020,221.96 P8.39 P8.39@2031,213
D9: P8.40 R21.2 | length 525.1
  Top Layer w10: R21.2 1855,323.11 1924.11,254 1936.98,254 1961,229.98 1961,196 1941,176 1941,149.98 1961,129.98 1961,65 1986,40 2045,40 2059.5,54.5 2059.5,71.5 2020,111 P8.40 P8.40@2027,113
D10: P8.28 R25.2 | length 249.6
  Top Layer w10: R25.2 1400,315 1365,280 1365,177 1420,122 P8.28
D10G: U2.67 U6.20 | length 290.9
  Top Layer w6: v1(1715,945) 1715,821.95 U6.20
  Signal Layer 1 w6: v1(1715,945) 1753.44,983.44 1753.44,1072.3 U2.67
D11: P8.30 R23.2 | length 291.9
  Top Layer w10: R23.2 1505,322 1463,280 1463,124 1488,99 1506,99 P8.30
FLAG1: R3.1 U1.6 U4.3 | length 240
  Top Layer w6: U4.3@1752.19,1727.64 U4.3@1754.16,1725.67 ; U4.3 1749.92,1738.47 R3.1 1749.92,1828.5 1786.42,1865 1817,1865 1849.17,1897.17 U1.6@1843.03,1903.31
FLAG2: R2.1 U1.5 U7.3 | length 403.7
  Top Layer w6: U7.3@1524.68,1734.67 R2.1 1554.68,1820 1722.94,1820 1804.84,1901.9 U1.5@1804.84,1923.78
FLAG3: R1.1 U1.4 U3.3 | length 448.6
  Top Layer w6: U1.4@1767.44,1904.09 1767.44,1938.48 1783.96,1955 1913.39,1955 1995,1873.39 1995,1737.52 U3.3
FRAME_VALID: U2.61 U6.22 | length 834.3
  Top Layer w6: U6.22 1677.58,947.58 v1(1680,950)
  Signal Layer 2 w6: v1(1680,950) 1680,1004.56 1617.36,1067.2 1617.36,1387.01 1640.59,1410.24 1792.95,1410.24 U2.61
FRAME_VALID3.3: P8.21 R26.2 | length 269.6
  Top Layer w10: P8.21 1144.07,212.97 1217.57,286.47 1306.47,286.47 1340,320 R26.2
GND: C1.2 C2.2 C3.1 C4.2 C5.1 C6.1 C7.2 C8.2 C9.2 C10.1 C11.1 C12.1 C13.1 C14.1 C15.1 C16.1 C17.1 C18.1 C19.1 C20.1 C21.1 C22.1 C23.1 C24.1 C25.1 C26.1 C27.1 C28.1 C29.1 C30.1 C31.1 C32.1 C33.1 C34.2 C35.2 C36.1 C37.2 C38.2 C39.2 C40.2 C41.1 C42.1 C43.2 C44.2 C45.2 J1.1 J2.1 P2.1 P2.2 P8.1 P8.2 pad.1 pad.2 R11.1 R13.1 R14.1 R15.1 U1.2 U2.10 U2.11 U2.13 U2.14 U2.15 U2.16 U2.19 U2.20 U2.21 U2.22 U2.23 U2.24 U2.25 U2.30 U2.31 U2.32 U2.33 U2.34 U2.35 U2.36 U2.37 U2.41 U2.43 U2.44 U2.45 U2.47 U2.48 U2.68 U2.69 U2.74 U2.79 U2.80 U2.81 U2.82 U2.83 U2.84 U2.85 U2.87 U2.89 U2.90 U2.91 U2.92 U2.93 U2.94 U2.95 U2.96 U2.97 U2.99 U2.100 U2.108 U3.2 U4.2 U4.4 U5.1 U6.1 U6.4 U6.10 U6.15 U6.21 U6.24 U6.28 U6.34 U6.39 U6.45 U7.2 U7.4 U8.2 U9.7 U10.1 U10.3 | length 4864.3
  Top Layer w6: U9.7@1078.89,1480.81 1079.28,1481.2 1191.09,1481.2 v2(1195.42,1476.87) ; 1545.14,1690.06 1545.83,1689.37 C6.1 ; C33.1@1678.78,1490.95 1722.87,1490.95 C32.1 ; 1748.86,1554.32 1757.6,1563.06 U4.4 ; C25.1@1836.26,1209.84 C25.1@1838.23,1211.81 ; C5.1@1893.93,1679.41 1941.17,1679.41 1948.1,1686.34 2011.03,1686.34 2022.02,1697.33 2022.02,1712.03 U3.2@2039.59,1729.6 ; C22.1 2034.59,1492.36 U3.2@2034.59,1715 ; C2.2@2039.59,1797.52 U3.2@2039.59,1729.6 ; C3.1 2110.18,1689.5 2065,1689.5 2057.17,1697.33 2057.17,1712.03 U3.2@2039.59,1729.6 ; C37.2 v1(2181.24,1077.74) ; C15.1 v1(2181.24,1113.17) ; C14.1 v1(2181.24,1148.61) ; C16.1 v1(2181.24,1184.04) ; C17.1@2144.68,1219.47 v1(2181.24,1219.47) ; C9.2 v1(2181.24,1254.91) ; C8.2 v1(2181.24,1290.34) ; C12.1 v1(2181.24,1325.77) ; C13.1 v1(2181.24,1361.2) ; C10.1 v1(2181.24,1396.64)
  Top Layer w10: C43.2 730,1178.91 v2(730,1109) ; R13.1@845.03,1551.67 845.03,1591.04 ; 847.43,1591.04 858.01,1601.62 v2(870.46,1601.62) ; R14.1 948.26,440.94 v1(1000.39,440.94) 1029.32,440.94 1030.5,442.13 ; U10.3 1052.01,400.64 1030.5,422.14 1030.5,442.13 ; U10.1 1084.26,512.95 C45.2 ; U10.1@1098.14,472.68 1052.07,472.68 1030.5,451.11 1030.5,442.13 ; v2(1185,1010) 1185,975.63 C36.1 ; v2(1195.42,1476.87) v2@1203.3,1476.87 ; C42.1 1265.62,1182.28 v2(1322.65,1182.28) ; R15.1 1335.64,815 v1(1362.15,841.51) U8.2@1362.15,892.19 ; v2(1464.79,1695.16) 1469.89,1690.06 1545.14,1690.06 ; v1(1483.5,1150.79) 1483.9,1150.39 C18.1 ; v1(1483.5,1190.16) 1485.47,1188.19 C19.1 ; v1(1483.5,1228.35) 1484.68,1227.17 C21.1 ; v1(1483.5,1263.39) 1483.9,1263.78 C20.1 ; v1(1483.5,1296.85) 1485.47,1298.82 C31.1 ; pad.2 1490.24,1052.09 R11.1 ; v2(1490.24,825) 1537.28,872.05 C35.2 1538.28,884.53 C34.2 1638.21,822.6 U6.24 ; U7.4 1529.75,1674.68 1545.14,1690.06 ; C7.2@1567.15,1790 U7.2 1551.58,1714.03 1551.58,1696.5 1545.14,1690.06 ; v2(1695,750) 1697.27,752.27 U6.21 ; U6.28 1697.71,523.79 v2@1697.71,607.71 ; v1(1724.84,1522.52) 1724.84,1530.31 1748.86,1554.32 ; C30.1@1782.32,1494.72 C30.1 v1(1782.32,1518.5) ; v2(1790,1830) 1790,1791.21 C4.2 U4.2@1791.56,1725.67 ; U1.2@1804.84,1998.58 v1(1804.84,2070.24) 1804.84,2118.82 C41.1 ; U6.34 v2@1815.38,605 ; v2(1815.38,745) U6.15 ; U6.39 v2@1913.8,613.8 ; v2(1913.8,740) U6.10 ; v1(2025.31,1965) C44.2 ; U6.45 v2(2031.91,608.09) ; U6.4 2035.68,820 2035.68,874.54 2077.88,874.54 2087.2,865.22 2087.2,820 U6.1 2105.97,835 v2(2133.02,835) ; 2034.59,1492.36 2040.76,1486.2 2040.76,1422.27 pad.1@2051.22,1411.81 ; C38.2 C39.2 2178.12,1002.58 2188.8,1013.27 ; C37.2@2144.68,1068.09 C37.2 ; C11.1 v1(2181.24,1432.07) ; v1(2248.66,1847.94) 2248.66,1924.66 2275,1951 U5.1
  Bottom Layer w6: U2.32 U2.31 U2.30 U2.19 U2.10 ; U2.21 U2.20 U2.11
  Bottom Layer w10: U2.108 U2.100 ; U2.97@1705.55,1340.95 1705.55,1309.45 U2.85@1737.05,1309.45 ; U2.97 U2.87 ; U2.85 U2.74 ; U2.41@1926.02,1120.47 1927.18,1119.32 1956.36,1119.32 U2.30@1957.52,1120.47
  other v1: 1937.83,1529.92 1974.45,1529.92 2009.88,1531.89
  other v2: 1910,610 1810,620 1700,625
INCK: J9.1 P2.26 R11.2 U2.107 U8.3 | length 1593.3
  Top Layer w10: 1296.65,1057.69 1312.74,1057.69 1360.15,1010.28 ; 1358.18,992.17 1360.15,994.13 ; U8.3 1361.81,957.52 R11.2@1491.97,957.52 ; U8.3@1360.15,971.28 1360.15,994.13 ; U2.107 1632.32,1108.66 1460,1108.66 1436.42,1085.08 1434.95,1085.08 1360.15,1010.28 ; 1360.15,994.13 1360.15,1010.28
  Signal Layer 1 w10: J9.1@1270,1050 1251,1069 1251,1943.97 P2.26 ; J9.1@1275.65,1072.69 J9.1@1281.65,1066.69
LINE_VALID: U2.86 U6.23 | length 932.3
  Top Layer w6: v1(1650,915) 1657.9,907.1 U6.23
  Signal Layer 1 w6: v1(1447.68,1311.73) 1461.15,1325.2 1698.75,1325.2 ; 1699.57,1324.37 1722.05,1324.37 U2.86
  Bottom Layer w6: v1(1447.68,1311.73) 1447.68,1027.56 1560.24,915 v1(1650,915)
LINE_VALID3.3: P8.20 R27.2 | length 428.7
  Top Layer w10: P8.20 1066.14,159.11 1066.14,254.33 1137.13,325.31 R27.2
NetC1_1: C1.1 U3.4 | length 63.1
  Top Layer w10: C1.1@1941.17,1640.04 1997.27,1640.04 U3.4@2002.19,1644.96
NetC3_2: C3.2 R30.1 U3.5 | length 124.8
  Top Layer w10: R30.1 2077,1596.51 U3.5 2092.36,1630.31 C3.2
NetC5_2: C5.2 R28.1 U4.5 | length 131
  Top Layer w6: U4.5 1887.24,1646.14 C5.2
  Top Layer w10: U4.5 1842.94,1635.61 R28.1
NetC6_2: C6.2 R29.1 U7.5 | length 117
  Top Layer w10: R29.1 1609.6,1588.91 1609.6,1650 C6.2
NetC37_1: C37.1 U2.2 | length 73.4
  Top Layer w6: U2.2 2052.4,1121.61 2096.28,1077.74 C37.1
NetC38_1: C38.1 U2.12 | length 155.1
  Top Layer w6: v1(2023.8,1084.4) 2023.8,1069.95 C38.1@2043.8,1049.95
  Signal Layer 1 w6: U2.12 2004.91,1166.29 2004.91,1103.3 v1(2023.8,1084.4)
NetC39_1: C39.1 U2.4 | length 154.3
  Top Layer w6: v1(2058.8,1085.27) 2080.75,1063.32 C39.1@2080.75,1050.95
  Signal Layer 1 w6: U2.4 2072.4,1162.28 2072.4,1099.29 2058.8,1085.69 v1(2058.8,1085.27)
NetC40_1: C40.1 U2.27 | length 92.4
  Top Layer w10: U2.27 1989.41,1403.69 1987.35,1405.75 2010.97,1429.37 C40.1
NetR9_1: R9.1 U6.44 | length 403.6
  Top Layer w10: U6.44 2012.23,463.66 2050.89,425 2250,425 2310,365 R9.1
NetR10_1: R10.1 U6.43 | length 386.9
  Top Layer w10: U6.43 1992.54,460.72 2044.26,409 2225.69,409 R10.1
NetR12_1: R12.1 U6.25 U6.48 U10.4 | length 1102.3
  Top Layer w10: U10.4@1182.78,397.87 R12.1@1233.67,397.87 ; R12.1 1276.54,396.54 1403.35,523.35 U6.25 ; v2(1585,530) v2@1585,541.48 ; U6.48 2121.37,523.35 v2(2128.02,530)
  Bottom Layer w10: v2(1585,530) v2(2128.02,530)
NetR16_1: R16.1 U6.41 | length 340.5
  Top Layer w10: U6.41 1953.17,471.23 2031.41,393 2172,393 2181.24,383.76 R16.1
NetR17_1: R17.1 U6.40 | length 318
  Top Layer w10: U6.40 1933.49,468.05 2024.54,377 2138.43,377 2145,370.43 R17.1
NetR18_1: R18.1 U6.38 | length 195.2
  Top Layer w10: U6.38 1894.12,456.86 1983.78,367.2 R18.1
NetR19_1: R19.1 U6.37 | length 189.6
  Top Layer w10: U6.37 1874.43,439.34 R19.1
NetR20_1: R20.1 U6.36 | length 173.3
  Top Layer w10: U6.36 1854.75,402.15 1890,366.89 R20.1
NetR21_1: R21.1 U6.35 | length 166.9
  Top Layer w10: U6.35 1835.06,384.62 R21.1
NetR22_1: R22.1 U6.33 | length 363.2
  Top Layer w10: R22.1 1708.32,364.68 1795.69,452.06 U6.33
NetR23_1: R23.1 U6.32 | length 388.7
  Top Layer w10: R23.1 1505,385 1510,390 1711.01,390 1776.01,455 U6.32
NetR24_1: R24.1 U6.30 | length 413.7
  Top Layer w10: R24.1@1435,374.68 1435,396.54 1445.46,407 1684.63,407 1732.95,455.32 1732.95,455.51 1736.64,459.2 U6.30
NetR25_1: R25.1 U6.29 | length 435.4
  Top Layer w10: R25.1@1400,374.68 1400,410.32 1412.68,423 1678,423 1716.95,461.95 U6.29
NetR26_1: R26.1 U6.27 | length 446.7
  Top Layer w10: R26.1@1340,374.68 1340,407.37 1371.63,439 1641.63,439 1677.58,474.95 U6.27
NetR27_1: R27.1 U6.26 | length 453
  Top Layer w10: R27.1@1305,374.68 1305,395 1365,455 1635,455 1657.9,477.9 U6.26
NetU2_39: U2.39 U6.6 | length 263.7
  Top Layer w6: U6.6 v1(1992.54,895)
  Signal Layer 1 w6: U2.39 1926.42,1027.99 1992.54,961.87 v1(1992.54,895)
NetU2_40: U2.40 U6.5 | length 307.4
  Top Layer w6: U6.5 2013.54,821.32 2013.54,916.54 v1(2017.01,920)
  Signal Layer 1 w6: U2.40 1926.42,1078.22 1941.92,1062.72 1941.92,1040.8 1941.77,1040.65 2015,967.42 2015,922.01 v1(2017.01,920)
NetU2_50: U2.50 U6.9 | length 252.3
  Top Layer w6: v1(1930,895) 1933.49,891.51 U6.9
  Signal Layer 1 w6: U2.50 1894.92,1018.11 1930,983.03 v1(1930,895)
NetU2_51: U2.51 U6.8 | length 291.9
  Top Layer w6: U6.8 v1(1953.17,923.9)
  Signal Layer 1 w6: U2.51 1894.92,1078.37 1910.42,1062.87 1910.42,1019.58 1953.17,976.83 v1(1953.17,923.9)
NetU2_58: U2.58 U6.12 | length 255
  Top Layer w6: U6.12 1874.43,894.43 v1(1875,895)
  Signal Layer 1 w6: U2.58 1831.93,999.13 1875.75,955.32 1875.75,895.75 v1(1875,895)
NetU2_59: U2.59 U6.11 | length 298.4
  Top Layer w6: U6.11 1896,821.88 1896,916 v1(1900,920)
  Signal Layer 1 w6: U2.59 1847.92,1071.8 1847.92,1049.73 1848.07,1049.59 1848.07,1039.76 1900,987.83 v1(1900,920)
NetU2_62: U2.62 U6.14 | length 250.6
  Top Layer w6: v1(1830,898.19) 1835.06,893.12 U6.14
  Signal Layer 1 w6: U2.62 1800.43,949.57 1830,920 v1(1830,898.19)
NetU2_63: U2.63 U6.13 | length 290.9
  Top Layer w6: U6.13 1854,820.75 1854,919.25 v1(1854.75,920)
  Signal Layer 1 w6: U2.63 1816.43,1071.8 1816.43,974.51 1854.75,936.19 v1(1854.75,920)
NetU2_66: U2.66 U6.17 | length 239.2
  Top Layer w6: v1(1770,895) 1776.01,888.99 U6.17
  Signal Layer 1 w6: U2.66 1770,1055.24 v1(1770,895)
OE_SHIFTERS: P8.11 R4.1 R13.2 R14.2 U9.8 U10.2 | length 3414.1
  Top Layer w6: P8.11 623.78,212.97 728.9,318.1 727.79,319.21 890.16,319.21 ; U9.8@886.37,1481.2 886.37,1569.39 1023.3,1706.32 v2(1161.65,1706.32) ; 890.16,316.54 890.16,319.21 ; v2(920.71,1037.32) 920.71,414.61 R14.2 890.16,343.47 890.16,319.21 ; U10.2 1106.8,438.04 1123.41,421.44 1123.41,349.04 1093.58,319.21 890.16,319.21 ; v2(2020,1915) 2023.9,1918.9 R4.1
  Bottom Layer w6: v2(920.71,1037.32) v2(920.71,1600.02) ; v2(1161.65,1706.32) 1258.75,1803.42 1420.24,1803.42 1420.66,1803 1923,1803 2020,1900 v2(2020,1915)
OMODE: U2.64 U9.5 | length 753.1
  Top Layer w6: U9.5@1079.28,1381.2 1082.04,1378.45 v1(1175.74,1378.45) ; v1@1502.4,1388.98 1505.94,1385.43 v1(1657.91,1385.43)
  Signal Layer 2 w6: v1(1657.91,1385.43) 1698.2,1385.43 1699.52,1386.76 1743.86,1386.76 1753.44,1377.18 1753.44,1364.84 1762.52,1355.76 1784.44,1355.76 U2.64
  Bottom Layer w6: v1(1175.74,1378.45) 1415.91,1378.45 1422.9,1385.43 v1(1501.61,1385.43)
OMODE3.3: P2.29 U9.10 | length 1255.8
  Top Layer w6: U9.10@881.25,1386.32 886.37,1381.2 820.63,1381.2 820.63,1618.06 1102.74,1900.17 1378.17,1900.17 1471,1993 1471,2063.97 P2.29
PIXCLK: J8.1 U2.55 | length 624.9
  Signal Layer 1 w6: U2.55 1878.92,1103.3 1968.94,1103.3 1973.41,1098.82 1973.41,1034.5 2117.91,890 2327.09,890 J8.1
PWR_EN3.3: P2.25 U1.3 | length 549.4
  Top Layer w6: P2.25 1330.97,2112.97 1370,2152 1652,2152 1767.44,2036.56 U1.3@1767.44,1998.58
SCL1.8V: J11.1 R6.1 U2.56 U5.3 | length 1226.4
  Top Layer w6: v2(2192.32,1837.46) 2192.32,1922.12 2245,1974.8 2245,2100.45 2265.73,2121.18 U5.3 2281.18,2115 R6.1
  Signal Layer 1 w6: v2(2192.32,1837.46) 2231.15,1798.62 J11.1@2382.46,1798.62
  Signal Layer 2 w6: U2.56 1879.42,1355.76 1879.42,1377.83 1879.57,1377.97 1879.57,1505.91 2192.32,1818.66 v2(2192.32,1837.46)
SCL3.3V: P2.19 R7.2 U5.6 | length 1266.7
  Top Layer w6: P2.19 1099.03,2192 1944.5,2192 R7.2 2028.5,2195 2100,2195 2117.42,2177.58 2117.42,2150 2088.6,2121.18 U5.6
SDA1.8V: J10.1 R5.1 U2.60 U5.4 | length 1459.1
  Top Layer w6: v2@2140.36,1839.53 v2(2140.88,1839.01) 2140.88,1934.42 2183.61,1977.16 2224.39,1977.16 2224.39,2105.43 2265.73,2146.77 U5.4 2283.23,2155 R5.1
  Signal Layer 1 w6: v2(2140.88,1839.01) 2140.88,1800.21 J10.1@2378.46,1562.62
  Signal Layer 2 w6: U2.60 1847.92,1355.76 1847.92,1518.75 2140.88,1811.71 v2(2140.88,1839.01)
SDA3.3V: P2.20 R8.2 U5.5 | length 1179.4
  Top Layer w6: P2.20 1064.52,2057.49 1064.52,2131.48 1102.05,2169 1887.5,2169 R8.2 1933.69,2122.81 2008.41,2122.81 2032.37,2146.77 U5.5
XCE: U2.57 U9.3 | length 923
  Top Layer w6: U9.3@1079.28,1281.2 U9.3@1091.92,1281.2 ; U9.3 1229.89,1281.62 1301.65,1353.38 v1(1301.65,1431.69) ; v1@1820.51,1414.17 v1(1820.51,1424.02)
  Signal Layer 1 w6: v1@1820.51,1414.17 U2.57
  Bottom Layer w6: v1(1301.65,1431.69) 1581.34,1431.69 1581.42,1431.76 1620,1431.76 1627.75,1424.02 v1(1820.51,1424.02)
XCE3.3: P2.28 U9.12 | length 1184.9
  Top Layer w6: U9.12@886.37,1281.2 859.15,1308.42 841.5,1308.42 786.06,1363.86 786.06,1615.77 1092.36,1922.07 1329.11,1922.07 P2.28
XCLR: U2.75 U9.4 | length 709.8
  Top Layer w6: U9.4@1079.28,1331.2 v1(1219.04,1331.2) ; v1(1468.15,1359.84) v1@1472.73,1355.26
  Signal Layer 1 w6: v1@1472.73,1355.26 1753.44,1355.26 U2.75
  Bottom Layer w6: v1(1219.04,1331.2) 1417.48,1331.2 1446.12,1359.84 v1(1468.15,1359.84)
XCLR3.3: P2.23 U9.11 | length 957
  Top Layer w6: U9.11@886.37,1331.2 945.98,1331.2 982.52,1367.74 982.52,1587.48 v2(980,1590)
  Bottom Layer w6: v2(980,1590) 980,1642 1169,1831 1169,2061.97 P2.23
XMASTER: U2.53 U9.2 | length 1006.2
  Top Layer w10: U9.2 1261.58,1231.62 v2(1322.65,1292.69)
  Signal Layer 1 w10: v2(1322.65,1292.69) 1517.8,1487.84 1521.57,1487.84 1530,1496.27 1772.03,1496.27 1772.8,1495.5 1791.85,1495.5 1792.61,1496.27 1838.8,1496.27 1870.68,1464.39 1871.98,1464.39 1880.18,1456.19 1880.18,1410.95 1894.92,1396.21 U2.53
XMASTER3.3: P8.12 U9.13 | length 1384.2
  Top Layer w10: P8.12 573,160 573,1095.16 709.46,1231.62 U9.13
pads on no net: P2.5 P2.6 P2.7 P2.8 P2.9 P2.10 P2.11 P2.12 P2.13 P2.14 P2.15 P2.16 P2.17 P2.18 P2.21 P2.22 P2.24 P2.30 P2.31 P2.32 P8.3 P8.4 P8.5 P8.6 P8.7 P8.8 P8.9 P8.10 P8.13 P8.14 P8.15 P8.16 P8.17 P8.18 P8.19 P8.22 P8.23 P8.24 P8.25 P8.26 P8.31 P8.32 P8.33 P8.34 P8.35 P8.36 P8.37 P8.38 U2.17 U2.18 U2.26 U2.49 U2.52 U2.54 U2.65 U2.76 U2.77 U2.78 U2.101 U2.102 U2.103 U2.104 U2.105 U2.109 U2.110 U2.111 U2.112 U2.113 U6.2 U6.3 U6.46 U6.47 U9.6 U9.9

## Polygon pours and split planes (outlines as drawn)
3.3V on Signal Layer 1 "3.3V" (solid, pour order 4): 2437.1,2231.97 2437.1,-3.03 -7.9,-3.03 -7.9,606.97 177.1,606.97 182.1,611.97 187.1,616.97 187.1,1606.97 -7.9,1606.97 -12.9,1611.97 -7.9,1616.97 -7.9,2231.97 2437.1,2231.97
GND on Signal Layer 2 "GND" (solid, pour order 5): -7.9,2231.97 -12.9,2226.97 -12.9,1611.97 182.1,1611.97 187.1,1606.97 179.6,1599.47 179.6,609.47 -5.4,609.47 -7.9,606.97 -7.9,-3.03 2437.11,-3.03 2437.11,2231.97 -7.9,2231.97

## Keep-outs
Keep-Out Layer:
  lines w6: 0.35,2229.6 0.35,1608.21 191.94,1608.21 197.23,1602.92 197.23,603.7 196.17,602.64 -0.71,602.64 -0.71,-0.71 0.71,0.71 2438.95,0.71 2439.65,1.41 2439.65,2228.88 2438.93,2229.6 0.35,2229.6 ; 0.35,2229.6 0.35,2229.6

## Other copper
Top Layer:
  rectangle net 1.8V: 1690,1560 1730,1650
  rectangle net 2.9V: 2120,1455 2175,1600.75
  rectangle net GND: 2022.02,1480 2049.8,1712.03
  rectangle net 1.2V: 1809.49,1449.21 1839.41,1557.78
  rectangle net 2.9V: 2090.8,1103.27 2118.8,1466.27
  rectangle net 2.9V: 2060.67,1457.09 2138.23,1512.99
  rectangle net GND: 2160.03,1057.66 2200.19,1448.03
  rectangle net 1.2V: 1879.17,1266.27 1937.8,1288.27
  rectangle net 1.2V: 1896.8,1388.98 1966.97,1425.27
  rectangle net 1.2V: 1946.89,1361.81 1966.97,1388.98
  rectangle net 1.2V: 1786.8,1157.27 1811.06,1274.02
  rectangle net 1.2V: 1699.8,1399.27 1786.56,1421.49
  rectangle net 1.2V: 1852.79,1444.88 1979.57,1461.42
  rectangle net 1.2V: 1670.12,1444.49 1922.09,1463.39
  rectangle net 1.2V: 1672.48,1421.49 1786.56,1467.72
  rectangle net 2.9V: 2047.28,1205.51 2110.28,1311.81
  rectangle net 2.9V: 2050.43,1142.91 2118.54,1157.48
  rectangle net GND: 1852.4,1477.56 2037.83,1505.51
  rectangle net GND: 1670.51,1477.95 1711.46,1531.89
  rectangle net GND: 1702.79,1480.32 1739.02,1504.33
  rectangle net GND: 1824.45,1115.35 1852.01,1253.54
  rectangle net GND: 1663.42,1111.42 1846.5,1138.19
  rectangle net GND: 1500.83,1136.61 1524.75,1307.87
  rectangle net GND: 2160.03,1000.18 2206.81,1445
  rectangle net GND: 2030.75,1332.68 2081.93,1430.71
  rectangle net GND: 1926.42,1307.87 1960.67,1339.76
  rectangle net GND: 1944.04,1214.57 2032.32,1319.29
  rectangle net GND: 1915.79,1174.02 1992.56,1255.91
  rectangle net GND: 1955.55,1119.29 1989.41,1182.28
  rectangle net GND: 1702.01,1504.33 1739.02,1533.07
  rectangle net GND: 1852.79,1499.61 2031.54,1542.52
  rectangle net 1.2V: 1864.8,1126.27 1893.35,1275.98
  rectangle net 1.2V: 1891.77,1140.55 1932.72,1161.42
  rectangle net 1.2V: 1757.8,1168.11 1795.31,1290.27
  rectangle net 1.2V: 1786.26,1267.72 1904.8,1317.27
  region net 1.2V: 1932.23,1283.7 1916.48,1267.95
  region net 2.9V: 2114.21,1154.33 2114.21,1201.58 2110.28,1205.51 2063.03,1205.51 2063.03,1199.55 2076,1186.59 2076,1167.3 2065.58,1156.88 2066.97,1155.49 2066.97,1154.33
Signal Layer 1:
  rectangle net 1.2V: 1752.01,1165.35 1795.31,1294.49
  rectangle net 1.2V: 1783.11,1146.06 1911.85,1317.72
  rectangle net 1.2V: 1879.17,1265.75 1934.68,1292.91
  region: -3242.9,-2033.03
Bottom Layer:
  rectangle net GND: 1948.07,1214.96 2032.32,1319.29
  rectangle net GND: 1915.79,1174.8 1989.02,1255.91
  rectangle net GND: 1663.42,1111.42 1771.69,1162.2
  rectangle net GND: 1663.82,1088.98 1715,1120.47
  rectangle net GND: 2013.82,1307.09 2031.93,1374.8
  rectangle net GND: 1675.63,1333.07 1713.03,1351.18
  rectangle net GND: 2014.21,1336.22 2081.54,1442.13
  rectangle net GND: 1695.71,1151.97 1737.05,1309.45
  rectangle net GND: 1957.91,1119.29 2020.91,1150.79
  rectangle net GND: 1957.91,1150.79 1989.41,1182.28
  rectangle net GND: 1926.42,1308.27 1957.91,1339.76

## Silkscreen, mask and mechanical layers (free items; w line width, h text height)
Top Overlay:
  lines w6: 1789.8,1108.27 1899.8,1108.27 ; 1831.93,1473.27 1831.93,1449.14 1857.8,1423.27 1868.98,1423.27 ; 1859.8,1278.27 1879.8,1278.27 1899.8,1258.27 1899.8,1240.55 ; 1869.8,1673.77 1869.8,1698.27 1879.8,1708.27 1893.93,1708.27 ; 1924.8,1708.27 1954.8,1708.27 1962.3,1700.77 1962.3,1677.95 ; 1992.24,1430.71 2030.75,1430.71 2049.8,1449.76 2049.8,1468.27 ; 2049.8,1458.27 2049.8,1517.24 2050.83,1518.27 2189.8,1518.27 2214.8,1543.27 2214.8,1641.2 2158.62,1697.38 2158.62,1816.21 ; 2214.8,1637.62 2349.84,1637.62 ; 2247.99,567.36 2352.99,567.36 ; 2285,645 2310,645 2335,620 2335,586.97
  text "1" at 1800.43,1273.27 h15
  text "1" at 2225,645 h15
Bottom Overlay:
  lines w10: 587.62,46.4 623.06,46.4 ; 587.62,279.6 623.06,279.6 ; 623.06,30.65 623.06,58.21 ; 623.06,267.79 623.06,295.35 ; 987.62,46.4 1023.06,46.4 ; 987.63,1946.37 1023.06,1946.37 ; 987.63,2179.57 1023.06,2179.57 ; 1023.06,30.65 1023.06,58.21 ; 1023.06,1930.62 1023.06,1958.18 ; 1023.06,2167.76 1023.06,2195.32 ; 1087.62,279.6 1123.06,279.6 ; 1123.06,267.79 1123.06,295.35 ; 1187.63,2179.57 1223.06,2179.57 ; 1223.06,2167.76 1223.06,2195.32 ; 1323.06,2167.76 1323.06,2179.57 ; 1387.63,1946.37 1423.06,1946.37 ; 1423.06,1930.62 1423.06,1958.18 ; 1423.06,2167.76 1423.06,2179.57 ; 1516.95,2167.76 1516.95,2195.32 ; 1516.95,2179.57 1552.38,2179.57
  text "PWR_EN" at 1367,2200 h15
  text "CLK_EN" at 1467,2200 h15
  text "SCL" at 859.62,2193.54 h30 r180
  text "XCLR" at 1059.62,2193.54 h30 r180
  text "OMODE" at 1705.92,2163.82 h30
  text "XCE" at 1370.2,1960.52 h30 r180
  text "SDA" at 859.62,1932.4 h30
  text "6/27 KL" at 76,1837.05 h25 r90
  text "3/15 OH" at 123.25,1837.05 h25 r90
  text "SCL" at 2417.51,1714.74 h30
  text "IMX291LQR-C-BBB" at 388.26,1609.14 h60 r90
  text "Adapter (v2.1)" at 284.25,1602.76 h60 r90
  text "SDA" at 2402,1470 h30
  text "1.2V" at 730,1328 h25
  text "2.9V" at 2409.46,1259.62 h25
  text "3.3V" at 2416.46,1040.62 h25
  text "INCK" at 1307.65,984.69 h15
  text "PIXCLK" at 2387.46,937.62 h15
  text "1.8V" at 707,856 h25
  text "D3" at 1446.08,274.06 h30
  text "D3" at 1548.44,274.06 h30
  text "D8" at 2044.51,274.06 h30
  text "D6" at 2142.93,274.06 h30
  text "D4" at 2245.29,274.06 h30
  text "D2" at 2343.72,274.06 h30
  text "OE_SHIFTERS" at 567.34,267.79 h30
  text "XVS" at 1067.34,267.79 h30
  text "1" at 37.28,207.13 h25
  text "45" at 2418.52,203.19 h25
  text "2" at 36.63,108.7 h25 r358.87
  text "46" at 2422.46,100.83 h25 r358.86
  text "XHS" at 967,32 h30
  text "X_MASTER" at 566,31 h30
  text "D10" at 1453.95,26.03 h30
  text "D11" at 1552.38,26.03 h30
  text "D9" at 2048.44,26.03 h30
  text "D7" at 2146.87,26.03 h30
  text "D5" at 2245.29,26.03 h30
  text "D3" at 2347.65,26.03 h30

## Text inside footprints (layer, text, board x,y; h text height)
P2: Bottom Overlay "32" at 1725.61,2006.34 h25; Bottom Overlay "31" at 1717.73,2104.77 h25; Bottom Overlay "1" at 28.76,2116.58 h25; Bottom Overlay "2" at 36.63,1998.47 h25